# EAGLE board shunt-smd-g (EAGLE 9.5.1)
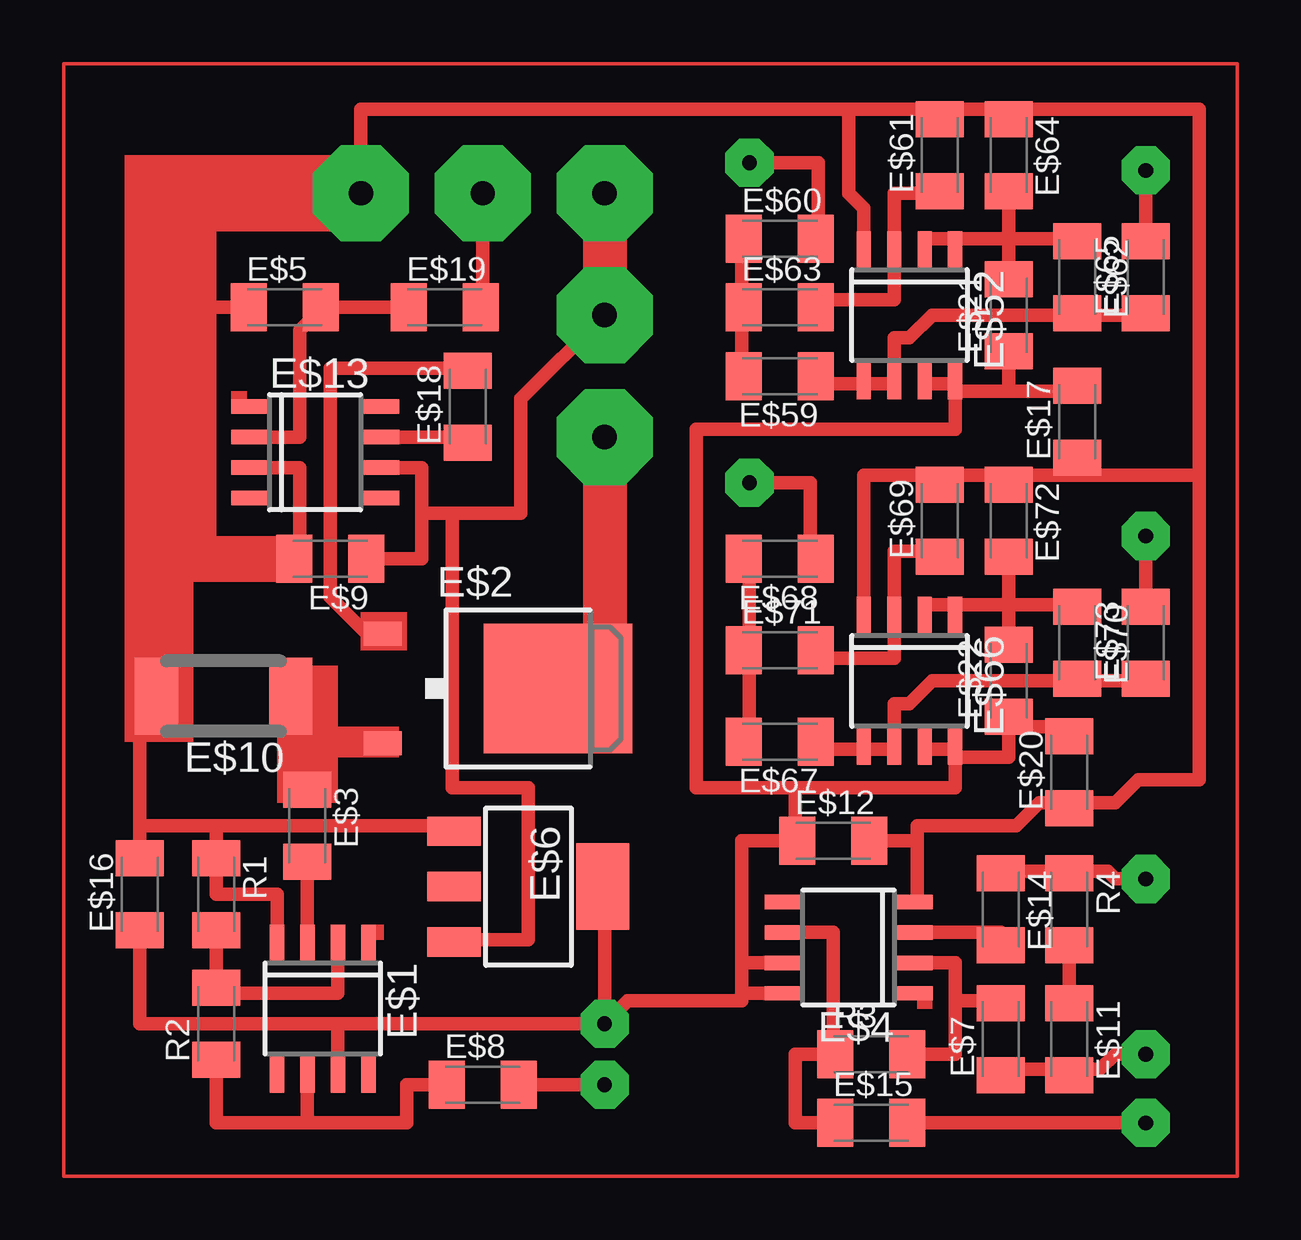
[diagram p0: board, top side]

No outline drawn. Coordinates in mm, seen from the top.
Copper layers (1*16): Top 0.035mm / dielectric 1.5mm / Bottom 0.035mm
Design rules "default": minimum track width 6mil, minimum drill 0.35mm, track to track 6mil, track to pad 6mil, pad to pad 6mil, via to via 6mil, smd to smd 6mil, copper to edge 40mil, drill to drill 6mil, minimum pad ring 10mil, minimum via ring 8mil, stop-mask expansion 4mil, vias tented up to drill 0mil, thermal gap 10mil

## Footprints (pad centres in the part's own frame; a part is rotated, then mirrored left to right if it is on the bottom)
SOIC8 = smd 0.6 x 1.5: 1 -1.905,-2.75; 2 -0.635,-2.75; 3 0.635,-2.75; 4 1.905,-2.75; 5 1.905,2.75; 6 0.635,2.75; 7 -0.635,2.75; 8 -1.905,2.75
TO252 = smd 1 x 1.6: 1 -2.28,-4.8; 2 2.28,-4.8 | smd 5.4 x 6.2: 3 0,2.5
C1206K = smd 1.5 x 2: 1 -1.5,0; 2 1.5,0
SOT223 = smd 1.219 x 2.235: 1 -2.311,-3.099; 2 0,-3.099; 3 2.311,-3.099 | smd 3.6 x 2.2: 4 0,3.099
R2512 = smd 1.8 x 3.2: 1 -2.8,0; 2 2.8,0

## Placement (x,y rotation side)
E$1  mcp601  [SOIC8]  12.38,10.16 180 top
E$2  AOD472  [TO252]  19.68,23.5 270 top
E$3  1k  [C1206K]  11.75,17.78 270 top
E$4  mcp601  [SOIC8]  34.29,12.7 90 top
E$5  15k  [C1206K]  10.79,39.37 0 top
E$6  1117  [SOT223]  20.95,15.24 270 top
E$7  1K  [C1206K]  40.64,8.89 90 top
E$8  1k  [C1206K]  19.05,6.99 0 top
E$9  1mk  [C1206K]  12.7,28.89 180 top
E$10  0.02R  [R2512]  8.26,23.18 180 top
E$11  31R  [C1206K]  43.5,8.89 270 top
E$12  1M  [C1206K]  33.66,17.14 0 top
E$13  ir4427  [SOIC8]  12.06,33.34 270 top
E$14  1K  [C1206K]  40.64,14.29 270 top
E$15  1K  [C1206K]  35.24,5.4 0 top
E$16  1mk  [C1206K]  4.76,14.92 90 top
E$17  [C1206K]  43.81,34.61 90 top
E$18  1k  [C1206K]  18.41,35.24 90 top
E$19  1k  [C1206K]  17.46,39.37 0 top
E$20  [C1206K]  43.5,20 90 top
E$21  [C1206K]  40.96,39.05 90 top
E$22  [C1206K]  40.96,23.81 90 top
E$52  mcp601  [SOIC8]  36.83,39.05 180 top
E$59  [C1206K]  31.43,36.51 180 top
E$60  [C1206K]  31.43,42.23 0 top
E$61  [C1206K]  38.1,45.72 90 top
E$62  [C1206K]  43.81,40.64 270 top
E$63  [C1206K]  31.43,39.37 0 top
E$64  [C1206K]  40.96,45.72 270 top
E$65  [C1206K]  46.67,40.64 90 top
E$66  mcp601  [SOIC8]  36.83,23.81 180 top
E$67  [C1206K]  31.43,21.27 180 top
E$68  [C1206K]  31.43,28.89 180 top
E$69  [C1206K]  38.1,30.48 90 top
E$70  [C1206K]  43.81,25.4 270 top
E$71  [C1206K]  31.43,25.08 0 top
E$72  [C1206K]  40.96,30.48 270 top
E$73  [C1206K]  46.67,25.4 90 top
R1  1k  [C1206K]  7.94,14.92 270 top
R2  22K  [C1206K]  7.94,9.53 90 top
R3  100K  [C1206K]  35.24,8.26 0 top
R4  31R  [C1206K]  43.5,14.29 270 top

## Library data of the parts
E$1 E$2 E$4 E$13 E$52 E$66 = linear
E$3 E$5 E$7-E$12 E$14-E$22 E$59-E$65 E$67-E$73 R1-R4 = rcl
E$6 = transistor-pnp

## Tracks (layer width: path | path; a pad name or v marks a point on that pad's centre or on a via)
S$1  (via drill 1.02 pad 4)
  Top 0.559: 34.92,17.14 37.15,17.14 | 37.15,17.14 37.15,17.78 41.27,17.78 42.23,18.73 45.4,18.73 46.35,19.68 48.9,19.68 48.9,32.38 | 37.15,17.14 37.15,14.61 36.83,14.61 | 48.9,32.38 48.9,47.62 34.29,47.62 | 48.9,32.38 34.92,32.38 34.92,26.35 | 34.92,41.59 34.92,43.5 34.29,44.13 34.29,47.62 | 34.29,47.62 13.97,47.62 v13.97,44.13
S$2
  Top 0.559: 17.46,6.99 15.88,6.99 15.88,5.4 11.75,5.4 | 7.94,7.94 7.94,5.4 11.75,5.4 | 11.75,7.62 11.75,5.4
S$4
  Top 0.559: 9.53,33.97 11.43,33.97 11.43,38.42 12.38,39.37 16.19,39.37
S$5
  Top 0.559: 43.5,12.7 43.5,10.48
S$6
  Top 0.559: 31.43,13.34 33.66,13.34 33.66,8.26 32.07,8.26 32.07,5.4 33.66,5.4
S$7
  Top 0.152: 50.48,49.53 50.48,3.17 1.59,3.17 1.59,49.53 50.48,49.53
S$8
  Top 0.559: 9.53,32.7 11.43,32.7 11.43,28.26
S$9
  Top 0.559: 15.24,25.72 14.29,25.72 12.7,27.3 12.7,36.83 18.41,36.83
S$11
  Top 0.559: 13.02,13.02 13.02,10.79 7.94,10.79 7.94,13.65
S$12
  Top 0.559: 20.32,6.99 24.13,6.99
S$13
  Top 0.559: 9.21,39.37 7.3,39.37
S$14  (via drill 0.61 pad 2.01)
  Top 0.559: 33.02,42.23 33.02,45.4 v30.16,45.4
S$16
  Top 0.559: 36.83,8.26 38.73,8.26 38.73,10.48 | 38.73,10.48 38.73,12.06 37.15,12.06 | 38.73,10.48 40.32,10.48
S$17  (via drill 0.61 pad 2.01)
  other vias: 24.13,6.99
S$18
  Top 0.559: 11.75,12.38 11.75,16.51
S$19  (via drill 1.02 pad 4)
  Top 0.559: 19.05,40.01 v19.05,44.13
S$20  (via drill 0.61 pad 2.01)
  Top 0.559: 36.83,5.4 v46.67,5.4
S$21
  Top 0.559: 37.47,26.35 37.47,26.99 40.96,26.99 | 40.96,26.99 40.96,29.21 | 40.96,25.08 40.96,26.99 | 43.81,26.99 40.96,26.99
S$22
  Top 0.559: 10.48,13.02 10.48,14.92 7.94,14.92 7.94,17.78 | 4.76,16.19 4.76,17.78 | 7.94,17.78 4.76,17.78 | 18.41,17.78 7.94,17.78 | 4.76,21.59 4.76,17.78
S$23  (via drill 0.61 pad 2.01)
  Top 0.559: 40.64,15.88 45.09,15.88 45.4,15.56 v46.67,15.56
S$24  (via drill 0.61 pad 2.01)
  Top 0.559: 40.64,7.62 44.77,7.62 45.4,8.26 v46.67,8.26
S$26
  Top 0.559: 36.83,13.34 40.64,13.34
S$27
  Top 0.559: 14.61,33.97 18.41,33.97
S$37  (via drill 1.02 pad 4)
  Top 0.559: v24.13,39.05 20.64,35.56 20.64,30.8 17.78,30.8 | 14.61,32.7 16.51,32.7 16.51,30.8 | 16.51,30.8 16.51,28.89 14.92,28.89 | 17.78,30.8 16.51,30.8 | 17.78,30.8 17.78,19.37 20.95,19.37 20.95,13.02 17.78,13.02
  Top 1.829: v24.13,44.13 v24.13,39.05
S$40  (via drill 1.02 pad 4)
  Top 1.829: v24.13,33.97 24.13,23.5
S$87
  Top 0.559: 33.02,39.69 36.2,39.69 36.2,44.13 38.1,44.13
S$88
  Top 0.559: 37.47,41.59 37.47,42.23 40.96,42.23 | 40.96,42.23 43.5,42.23 | 40.96,40.64 40.96,42.23 | 40.96,44.13 40.96,42.23
S$89
  Top 0.559: 29.84,36.51 29.84,42.23
S$95  (via drill 0.61 pad 2.01)
  Top 0.559: 37.47,36.51 37.47,36.2 38.73,36.2 | 38.73,36.2 38.73,36.51 | 38.73,36.2 38.73,35.88 | 38.73,35.88 38.73,34.29 27.94,34.29 27.94,19.37 32.07,19.37 | 37.47,21.27 37.47,20.95 38.73,20.95 | 38.73,20.95 38.73,21.27 | 38.73,20.95 38.73,20.64 | 38.73,20.64 38.73,19.37 32.07,19.37 | 29.84,12.06 29.84,17.14 32.07,17.14 32.07,19.37 | 31.75,12.06 29.84,12.06 | 29.84,12.06 29.84,10.79 | 29.84,10.79 31.75,10.79 | 29.84,10.79 29.84,10.48 25.08,10.48 v24.13,9.53 | v24.13,9.53 24.13,14.92 | 4.76,13.34 4.76,9.53 13.02,9.53 | 13.02,9.53 13.02,7.3 | v24.13,9.53 13.02,9.53 | 44.13,35.88 40.96,35.88 | 40.96,35.88 38.73,35.88 | 38.73,20.64 40.96,20.64 40.96,21.91 43.81,21.91 | 40.96,35.88 40.96,37.47
S$98  (via drill 0.61 pad 2.01)
  Top 0.559: 46.67,42.23 v46.67,45.09
S$101
  Top 0.559: 46.67,39.05 37.78,39.05 36.83,38.1 36.2,38.1 36.2,36.2 34.92,36.2 | 34.92,36.2 34.92,36.51 | 32.7,36.2 34.92,36.2
S$102
  Top 0.559: 32.7,24.77 36.2,24.77 36.2,29.21 38.1,29.21
S$104
  Top 0.559: 30.16,21.27 30.16,29.21
S$105
  Top 0.559: 32.7,28.26 32.7,32.07 30.16,32.07
S$107  (via drill 0.61 pad 2.01)
  other vias: 30.16,32.07
S$109  (via drill 0.61 pad 2.01)
  Top 0.559: 46.67,26.67 v46.67,29.84
S$112
  Top 0.559: 46.67,23.81 37.78,23.81 36.83,22.86 36.2,22.86 36.2,20.95 34.92,20.95 | 34.92,20.95 34.92,21.27 | 32.7,20.95 34.92,20.95
(copper drawn outside any net)
  shapes: Top area x10

## Text on the board
tNames: in
tValues: in | out | in | out | +in | + | -in | out